# Allegro board SATROT-2-POWERBOARD-2.brd
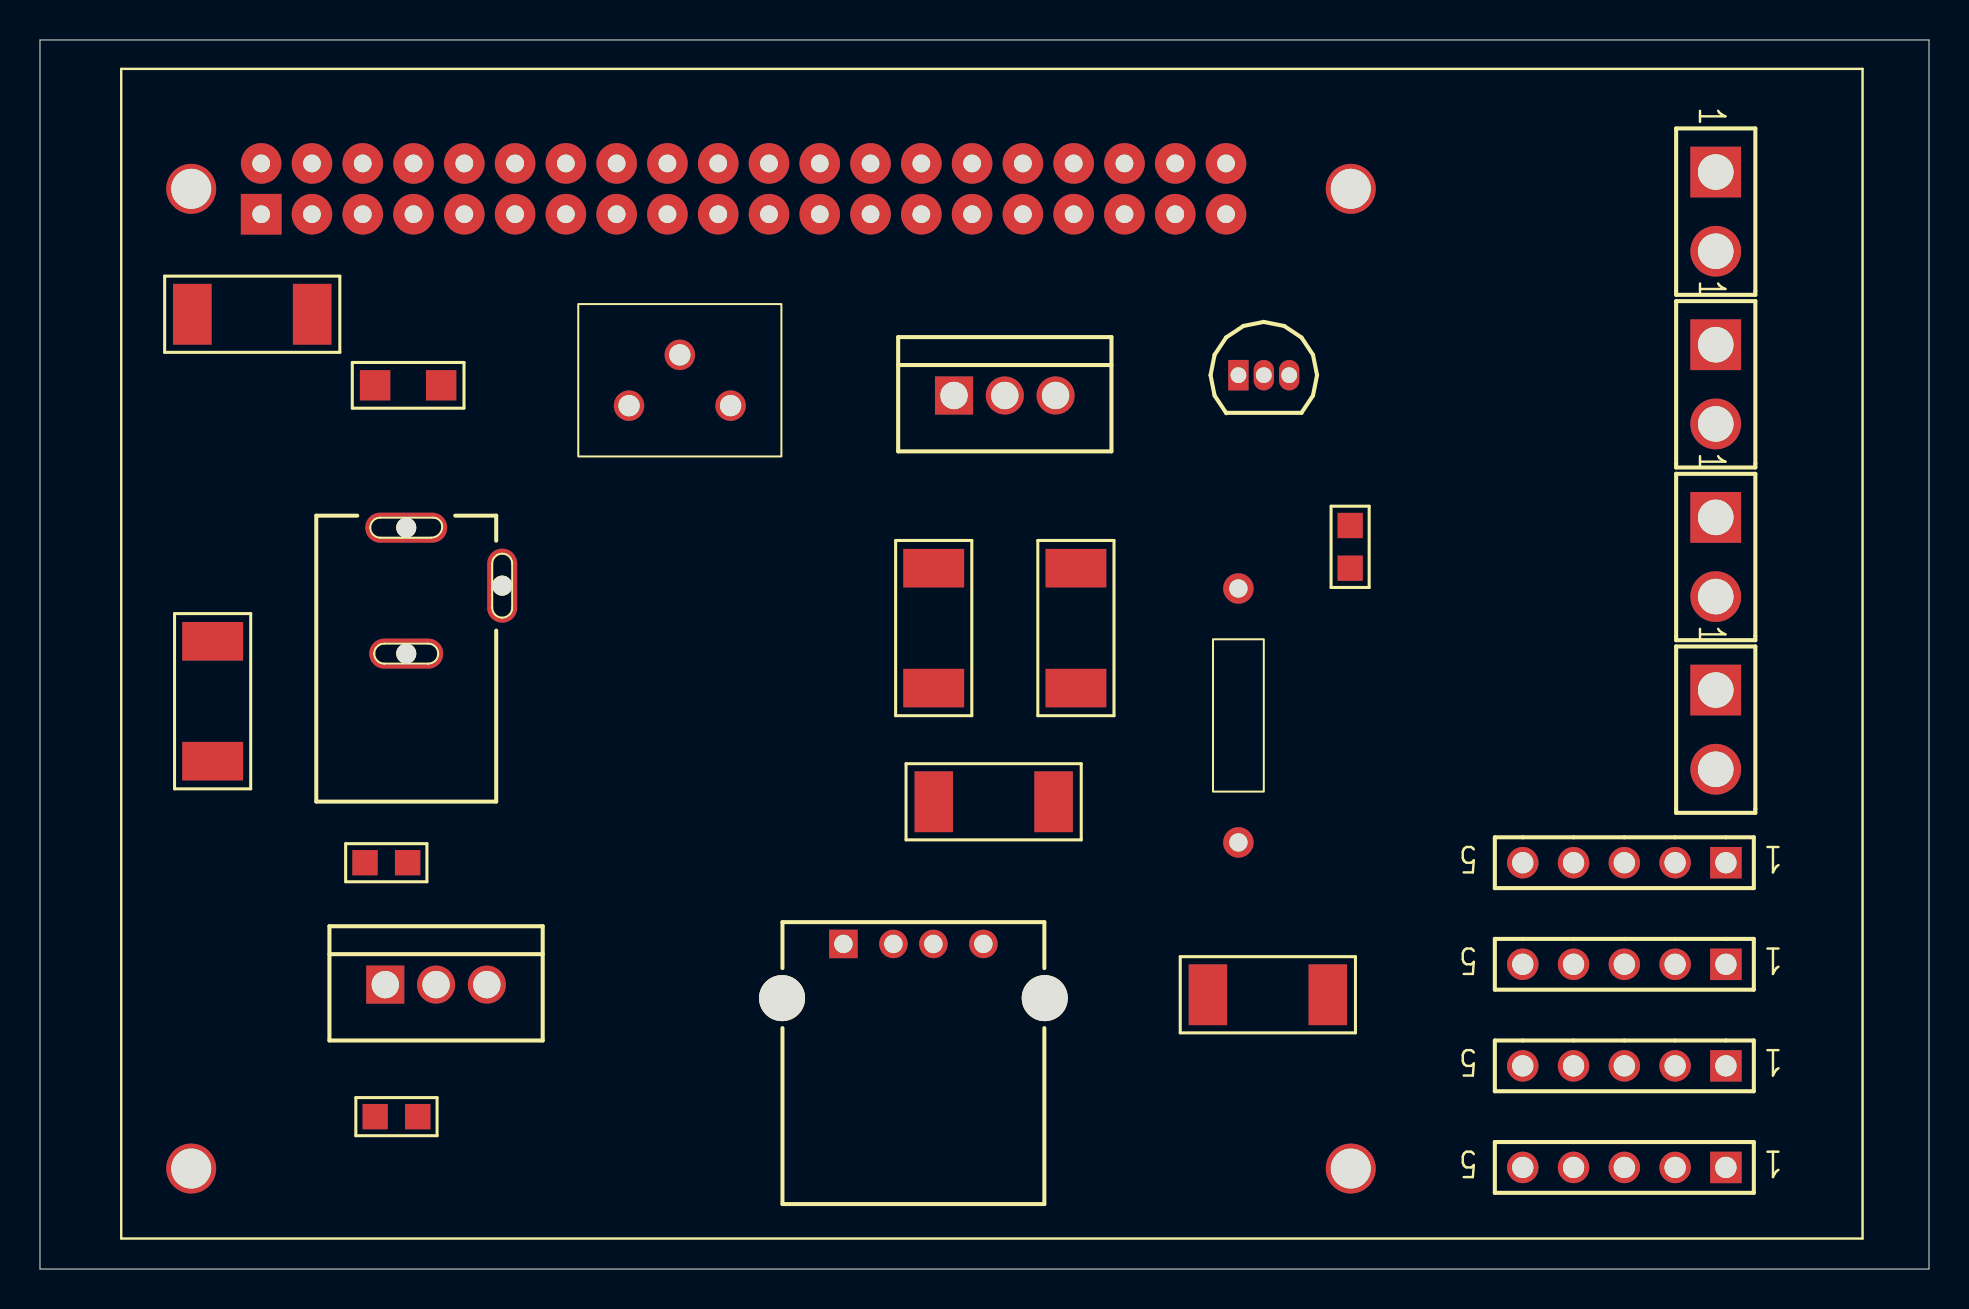
[diagram p0: board, top side]
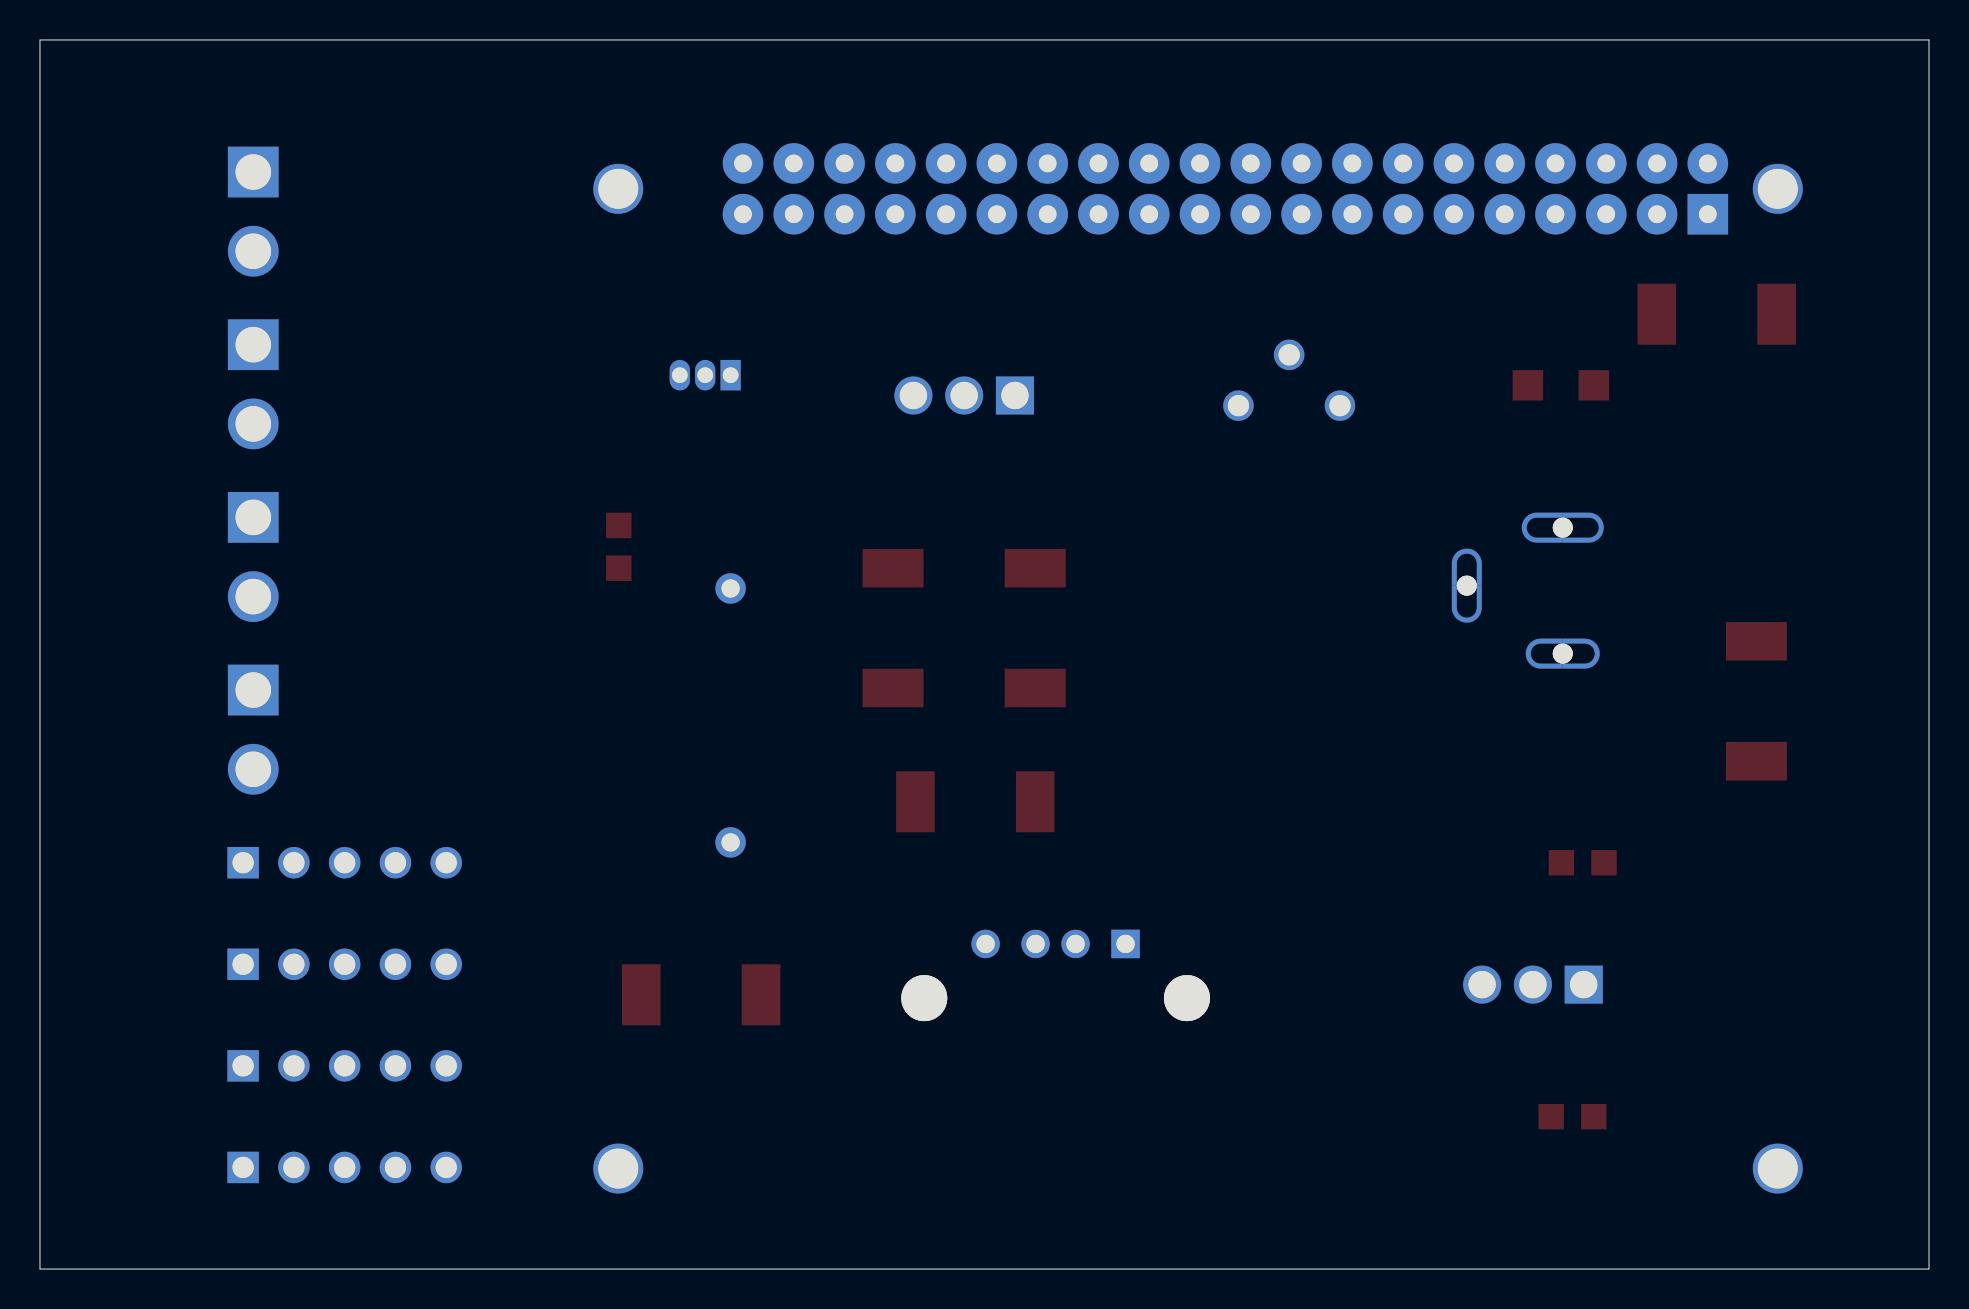
[diagram p1: board, bottom side, seen from below]

Outline 94.49 x 61.47 mm; copper layers: TOP, BOTTOM. Coordinates in mm from the lower left corner of the outline.
Outline path: 0,61.47 94.49,61.47 94.49,0 0,0 0,61.47

## Design rules (mm)
constraint set DEFAULT: min track width 0.305

## Placement (name value [footprint] x y rotation side)
J11  To batteries  [BLKCON156VHTM1SQSW1562]  83.82 28.96 270 top
J12  12V out  [BLKCON156VHTM1SQSW1562]  83.82 37.59 270 top
J13  5V out  [BLKCON156VHTM1SQSW1562]  83.82 46.23 270 top
J14  3V3 out  [BLKCON156VHTM1SQSW1562]  83.82 54.86 270 top
J16  DCJ200-10-A-XX-X_REVA  [GCT_DCJ200-10-A-XX-X_REVA]  20.32 33.53 0 top
J17  12V pin out  [BLKCON100VHTM1SQSW1005]  84.33 5.08 180 top
J18  5V pin out  [BLKCON100VHTM1SQSW1005]  84.33 10.16 180 top
J19  3V3 pin out  [BLKCON100VHTM1SQSW1005]  84.33 15.24 180 top
J20  GND  [BLKCON100VHTM1SQSW1005]  84.33 20.32 180 top
P1  USB-A1HSW6  [OST_USB-A1HSW6]  43.69 15.75 0 top
Q1  BC327  [TO92]  59.94 44.7 0 top
Q3  MJE2955  [TO220AB]  17.27 14.22 0 top
Q4  3055T  [TO220AB]  45.72 43.69 0 top
R26  10K  [SMR1206]  16.76 44.2 0 top
R27  1M  [RES500]  59.94 34.04 0 top
R29  150, 2W  [SMR2512]  58.42 13.72 0 top
R30  100K  [SMR0805]  16.76 7.62 0 top
R32  100K  [SMR0805]  16.26 20.32 0 top
R34  1, 2W  [SMR2512]  8.64 25.4 90 top
R37  680  [SMR0805]  65.53 35.05 90 top
R39  0.15, 10W  [SMR2512]  51.82 35.05 270 top
R40  0.15, 10W  [SMR2512]  44.7 35.05 270 top
R41  2.7K  [SMR2512]  44.7 23.37 0 top
R42  3.3K  [SMR2512]  7.62 47.75 0 top
R43  1K POT  [POT]  29.46 43.18 0 top
U8  Raspberry Pi B+  [GU-RASP-PI-3]  4.06 1.52 0 top

## Library data of the parts
J11 = CON2
J12-J14 = HEADER 2
J16 = DCJ200-10-A-XX-X_REVA
J17-J20 = CON5
P1 = USB-A1HSW6
Q1 Q3 = BC327
Q4 = BC337
R26 R29 R30 R32 R34 R37 R39-R42 = R
R27 = R: Tolerance: ***; User Part Number: ***
R43 = POT: User Part Number: ***
U8 = Raspberry Pi B+

## Footprints (pads in the part's own frame, mm; a bottom-side part is the same pattern mirrored in y, then rotated)
BLKCON100VHTM1SQSW1005
  rect 1.575x1.575 hole 1.067: 1(0,0)
  round 1.575 hole 1.067: 2(2.54,0) 3(5.08,0) 4(7.62,0) 5(10.16,0)
BLKCON156VHTM1SQSW1562
  rect 2.54x2.54 hole 1.778: 1(0,0)
  round 2.54 hole 1.778: 2(3.962,0)
GCT_DCJ200-10-A-XX-X_REVA
  round 1 hole 1 unplated: (-2,3.55) (-2,-2.75) (2.8,0.65)
  rect 0.1x0.1 smd: 1(-2,2.95) 2(-2,-2.1) 3(2.2,0.65)
GU-RASP-PI-3
  round 2.5 hole 2 unplated: (3.5,52.5) (3.5,3.5) (61.5,52.5) (61.5,3.5)
  rect 2.032x2.032 hole 0.889: 1(7,51.23)
  round 2.032 hole 0.889: 2(7,53.77) 3(9.54,51.23) 4(9.54,53.77) 5(12.08,51.23) 6(12.08,53.77) 7(14.62,51.23) 8(14.62,53.77) 9(17.16,51.23) 10(17.16,53.77) 11(19.7,51.23) 12(19.7,53.77) 13(22.24,51.23) 14(22.24,53.77) 15(24.78,51.23) 16(24.78,53.77) 17(27.32,51.23) 18(27.32,53.77) 19(29.86,51.23) 20(29.86,53.77) 21(32.4,51.23) 22(32.4,53.77) 23(34.94,51.23) 24(34.94,53.77) 25(37.48,51.23) 26(37.48,53.77) 27(40.02,51.23) 28(40.02,53.77) 29(42.56,51.23) 30(42.56,53.77) 31(45.1,51.23) 32(45.1,53.77) 33(47.64,51.23) 34(47.64,53.77) 35(50.18,51.23) 36(50.18,53.77) 37(52.72,51.23) 38(52.72,53.77) 39(55.26,51.23) 40(55.26,53.77)
OST_USB-A1HSW6
  round 2.3 hole 2.3 unplated: (-6.57,-2.2) (6.57,-2.2)
  rect 1.428x1.428 hole 0.92: 1(-3.5,0.51)
  round 1.428 hole 0.92: 2(-1,0.51) 3(1,0.51) 4(3.5,0.51)
POT
  round 1.524 hole 1.067: 1(0,0) 2(5.08,0) 3(2.54,2.54)
RES500
  round 1.524 hole 0.914: 1(0,-12.7) 2(0,0)
SMR0805
  rect 1.27x1.27 smd: 1(0,0) 2(2.134,0)
SMR1206
  rect 1.524x1.524 smd: 1(0,0) 2(3.302,0)
SMR2512
  rect 1.93x3.048 smd: 1(0,0) 2(5.994,0)
TO92
  rect 1.016x1.524 hole 0.787: 1(0,0)
  oval 1.016x1.524 hole 0.787: 2(1.27,0) 3(2.54,0)
TO220AB
  rect 1.905x1.905 hole 1.372: 1(0,0)
  round 1.905 hole 1.372: 2(2.54,0) 3(5.08,0)

## Nets
GND1: U8.6
GND3: U8.14
GND4: U8.20
GND5: U8.25
GND6: U8.30
GND7: U8.34
GND8: U8.39
GND_POWER: J11.2 J12.2 J13.2 J14.2 J16.2 J16.3 J20.1 J20.2 J20.3 J20.4 J20.5 P1.4 Q1.1 R42.2
P3V3: U8.1 U8.17
P5V: U8.2 U8.4(P5V#4)
N12978: J16.1 R26.1 R34.2
N13093: Q3.2 R29.1
N13141: Q1.3(EMITTER) R29.2
N13166: Q1.2 R26.2 R27.1
N13277: R30.2
N13315: Q3.1 R30.1 R32.2
N13493: R32.1
N14154: J11.1
N14459: Q4.3
N14998: Q4.1(EMITTER)
N15094: R39.1 R40.1
N15485: Q4.2
N15940: R42.1 R43.3
N15944: R43.2(WIPER)
N16055: J12.1 J17.1 J17.2 J17.3 J17.4 J17.5 R37.1 R39.2 R40.2 R41.1
N17520: J13.1 J18.1 J18.2 J18.3 J18.4 J18.5 P1.1(VBUS)
N19133: J14.1 J19.1 J19.2 J19.3 J19.4 J19.5
N43227: R37.2
N359760: R41.2 R43.1
N360181: R27.2
N366460: Q3.3(EMITTER) R34.1

Pads without a net: P1 2 3; U8 3 5 7 8 9 10 11 12 13 15 16 18 19 21 22 23 24 26 27 28 29 31 32 33 35 36 37 38 40

## Copper pours and planes (outline as drawn; the poured copper is in the pictures)
GND_POWER on TOP (solid shape): 18.32,31.28 17.22,31.28 16.87,31.13 16.72,30.78 16.87,30.42 17.22,30.28 18.32,30.28 18.32,30.03 17.22,30.03 16.69,30.25 16.47,30.78 16.69,31.31 17.22,31.53 18.32,31.53
GND_POWER on TOP (solid shape): 19.42,31.53 19.95,31.31 20.17,30.78 19.95,30.25 19.42,30.03 18.32,30.03 18.32,30.28 19.42,30.28 19.77,30.42 19.92,30.78 19.77,31.13 19.42,31.28 18.32,31.28 18.32,31.53
GND_POWER on TOP (solid shape): 22.62,33.08 22.77,32.72 23.12,32.58 23.47,32.72 23.62,33.08 23.62,34.18 23.87,34.18 23.87,33.08 23.65,32.55 23.12,32.33 22.59,32.55 22.37,33.08 22.37,34.18 22.62,34.18
GND_POWER on TOP (solid shape): 23.65,35.81 23.87,35.28 23.87,34.18 23.62,34.18 23.62,35.28 23.47,35.63 23.12,35.78 22.77,35.63 22.62,35.28 22.62,34.18 22.37,34.18 22.37,35.28 22.59,35.81 23.12,36.03
Net_5 on BOTTOM (solid shape): 18.32,31.28 17.22,31.28 16.87,31.13 16.72,30.78 16.87,30.42 17.22,30.28 18.32,30.28 18.32,30.03 17.22,30.03 16.69,30.25 16.47,30.78 16.69,31.31 17.22,31.53 18.32,31.53
Net_5 on BOTTOM (solid shape): 19.42,31.53 19.95,31.31 20.17,30.78 19.95,30.25 19.42,30.03 18.32,30.03 18.32,30.28 19.42,30.28 19.77,30.42 19.92,30.78 19.77,31.13 19.42,31.28 18.32,31.28 18.32,31.53
Net_6 on BOTTOM (solid shape): 22.62,33.08 22.77,32.72 23.12,32.58 23.47,32.72 23.62,33.08 23.62,34.18 23.87,34.18 23.87,33.08 23.65,32.55 23.12,32.33 22.59,32.55 22.37,33.08 22.37,34.18 22.62,34.18
Net_6 on BOTTOM (solid shape): 23.65,35.81 23.87,35.28 23.87,34.18 23.62,34.18 23.62,35.28 23.47,35.63 23.12,35.78 22.77,35.63 22.62,35.28 22.62,34.18 22.37,34.18 22.37,35.28 22.59,35.81 23.12,36.03
Net_7 on BOTTOM (solid shape): 18.32,37.58 17.02,37.58 16.67,37.43 16.52,37.08 16.67,36.72 17.02,36.58 18.32,36.58 18.32,36.33 17.02,36.33 16.49,36.55 16.27,37.08 16.49,37.61 17.02,37.83 18.32,37.83
Net_7 on BOTTOM (solid shape): 19.62,37.83 20.15,37.61 20.37,37.08 20.15,36.55 19.62,36.33 18.32,36.33 18.32,36.58 19.62,36.58 19.97,36.72 20.12,37.08 19.97,37.43 19.62,37.58 18.32,37.58 18.32,37.83
N12978 on TOP (solid shape): 18.32,37.58 17.02,37.58 16.67,37.43 16.52,37.08 16.67,36.72 17.02,36.58 18.32,36.58 18.32,36.33 17.02,36.33 16.49,36.55 16.27,37.08 16.49,37.61 17.02,37.83 18.32,37.83
N12978 on TOP (solid shape): 19.62,37.83 20.15,37.61 20.37,37.08 20.15,36.55 19.62,36.33 18.32,36.33 18.32,36.58 19.62,36.58 19.97,36.72 20.12,37.08 19.97,37.43 19.62,37.58 18.32,37.58 18.32,37.83
